# EAGLE board Neat Trug-Gaaris (EAGLE 7.6.0)

Size 73.58 x 63.39 mm. Coordinates in mm from the lower left corner, seen from the top.
Outline: 0,0 56.82,0 56.82,53.33 0,53.33 0,0
Copper layers (1*16): Top 0.035mm / dielectric 1.5mm / Bottom 0.035mm
Design rules "default": minimum track width 10mil, minimum drill 24mil, track to track 8mil, track to pad 8mil, pad to pad 8mil, via to via 8mil, smd to smd 8mil, copper to edge 40mil, drill to drill 8mil, minimum pad ring 10mil, minimum via ring 8mil, stop-mask expansion 4mil, vias tented up to drill 0mil, thermal gap 10mil

## Footprints (pad centres in the part's own frame; a part is rotated, then mirrored left to right if it is on the bottom)
LED5MM = drill 0.813 octagon: A -1.27,0; K 1.27,0
ARDUINO_UNO = drill 1.016 pad 1.88: 0 63.5,50.8; 1 60.96,50.8; 2 58.42,50.8; 3 55.88,50.8; 3.3V 35.56,2.54; 4 53.34,50.8; 5 50.8,50.8; 5V 38.1,2.54; 6 48.26,50.8; 7 45.72,50.8; 8 41.656,50.8; 9 39.116,50.8; 10 36.576,50.8; 11 34.036,50.8; 12 31.496,50.8; 13 28.956,50.8; A0 50.8,2.54; A1 53.34,2.54; A2 55.88,2.54; A3 58.42,2.54; A4 60.96,2.54; A5 63.5,2.54; AREF 23.876,50.8; GND 26.416,50.8; GND. 43.18,2.54; GND.. 40.64,2.54; I/OREF 30.48,2.54; N/C 27.94,2.54; RESET 33.02,2.54; SCL 18.796,50.8; SDA 21.336,50.8; VIN 45.72,2.54 | hole 3.2: 66.04,7.62; 66.04,35.56; 15.24,50.8; 13.97,2.54
DIL16 = drill 0.813 long: 1 -8.89,-3.81; 2 -6.35,-3.81; 3 -3.81,-3.81; 4 -1.27,-3.81; 5 1.27,-3.81; 6 3.81,-3.81; 7 6.35,-3.81; 8 8.89,-3.81; 9 8.89,3.81; 10 6.35,3.81; 11 3.81,3.81; 12 1.27,3.81; 13 -1.27,3.81; 14 -3.81,3.81; 15 -6.35,3.81; 16 -8.89,3.81

## Placement (x,y rotation side)
D2  [LED5MM]  5,35.48 0 top
D3  [LED5MM]  5,48.18 0 top
D4  [LED5MM]  5,60.88 0 top
D5  [LED5MM]  5,73.58 0 top  (outside the outline)
D6  [LED5MM]  5,86.28 0 top  (outside the outline)
D7  [LED5MM]  5,98.98 0 top  (outside the outline)
D8  [LED5MM]  5,111.68 0 top  (outside the outline)
D9  [LED5MM]  5,124.38 0 top  (outside the outline)
D10  [LED5MM]  5,137.08 0 top  (outside the outline)
D11  [LED5MM]  5,149.78 0 top  (outside the outline)
D12  [LED5MM]  5,162.48 0 top  (outside the outline)
D13  [LED5MM]  5,175.18 0 top  (outside the outline)
D14  [LED5MM]  5,187.88 0 top  (outside the outline)
D15  [LED5MM]  5,200.58 0 top  (outside the outline)
D16  [LED5MM]  5,213.28 0 top  (outside the outline)
D17  [LED5MM]  5,225.98 0 top  (outside the outline)
D18  [LED5MM]  5,238.68 0 top  (outside the outline)
D19  [LED5MM]  5,251.38 0 top  (outside the outline)
D20  [LED5MM]  5,264.08 0 top  (outside the outline)
D21  [LED5MM]  5,276.78 0 top  (outside the outline)
D22  [LED5MM]  5,289.48 0 top  (outside the outline)
D23  [LED5MM]  5,302.18 0 top  (outside the outline)
D24  [LED5MM]  5,314.88 0 top  (outside the outline)
D25  [LED5MM]  5,327.58 0 top  (outside the outline)
D26  [LED5MM]  5,340.28 0 top  (outside the outline)
D27  [LED5MM]  5,352.98 0 top  (outside the outline)
D28  [LED5MM]  5,365.68 0 top  (outside the outline)
D29  [LED5MM]  5,378.38 0 top  (outside the outline)
D30  [LED5MM]  5,391.08 0 top  (outside the outline)
D31  [LED5MM]  5,403.78 0 top  (outside the outline)
D32  [LED5MM]  5,416.48 0 top  (outside the outline)
D33  [LED5MM]  5,429.18 0 top  (outside the outline)
D34  [LED5MM]  5,441.88 0 top  (outside the outline)
D35  [LED5MM]  5,454.58 0 top  (outside the outline)
D36  [LED5MM]  5,467.28 0 top  (outside the outline)
D37  [LED5MM]  5,479.98 0 top  (outside the outline)
D38  [LED5MM]  5,492.68 0 top  (outside the outline)
D39  [LED5MM]  5,505.38 0 top  (outside the outline)
D40  [LED5MM]  5,518.08 0 top  (outside the outline)
D41  [LED5MM]  5,530.78 0 top  (outside the outline)
D42  [LED5MM]  5,543.48 0 top  (outside the outline)
D43  [LED5MM]  5,556.18 0 top  (outside the outline)
D44  [LED5MM]  5,568.88 0 top  (outside the outline)
D45  [LED5MM]  5,581.58 0 top  (outside the outline)
D46  [LED5MM]  5,594.28 0 top  (outside the outline)
D47  [LED5MM]  5,606.98 0 top  (outside the outline)
D48  [LED5MM]  5,619.68 0 top  (outside the outline)
D49  [LED5MM]  5,632.38 0 top  (outside the outline)
D50  [LED5MM]  5,645.08 0 top  (outside the outline)
D51  [LED5MM]  5,657.78 0 top  (outside the outline)
D52  [LED5MM]  5,670.48 0 top  (outside the outline)
D53  [LED5MM]  5,683.18 0 top  (outside the outline)
D54  [LED5MM]  5,695.88 0 top  (outside the outline)
D55  [LED5MM]  5,708.58 0 top  (outside the outline)
D56  [LED5MM]  5,721.28 0 top  (outside the outline)
D57  [LED5MM]  5,733.98 0 top  (outside the outline)
D58  [LED5MM]  5,746.68 0 top  (outside the outline)
D59  [LED5MM]  5,759.38 0 top  (outside the outline)
D60  [LED5MM]  5,772.08 0 top  (outside the outline)
D61  [LED5MM]  5,784.78 0 top  (outside the outline)
D62  [LED5MM]  5,797.48 0 top  (outside the outline)
D63  [LED5MM]  5,810.18 0 top  (outside the outline)
D64  [LED5MM]  5,822.88 0 top  (outside the outline)
D65  [LED5MM]  5,835.58 0 top  (outside the outline)
U1  [ARDUINO_UNO]  5,10.08 0 top
U2  [DIL16]  5,22.78 0 top
U3  [DIL16]  5,848.28 0 top  (outside the outline)

## Library data of the parts
D2-D65 U1-U3 = AUTODESK_CIRCUITS_BREADBOARD

## Nets
N$1: D2.A D5.A D6.A D7.A D8.A D9.A D10.A D11.A U2.7
N$2: D3.A D12.A D13.A D14.A D15.A D16.A D17.A D18.A U2.6
N$3: D4.A D19.A D20.A D21.A D22.A D23.A D24.A D25.A U2.5
N$4: D26.A D27.A D28.A D29.A D30.A D31.A D32.A D33.A U2.4
N$5: D34.A D35.A D36.A D37.A D38.A D39.A D40.A D41.A U2.3
N$6: D42.A D43.A D44.A D45.A D46.A D47.A D48.A D49.A U2.2
N$7: D50.A D51.A D52.A D53.A D54.A D55.A D56.A D57.A U2.1
N$8: D58.A D59.A D60.A D61.A D62.A D63.A D64.A D65.A U2.15
N$9: D8.K D12.K D19.K D26.K D34.K D42.K D50.K D58.K U3.15
N$10: D2.K D3.K D4.K D27.K D35.K D43.K D51.K D59.K U3.1
N$11: D5.K D13.K D20.K D28.K D36.K D44.K D52.K D60.K U3.2
N$12: D6.K D14.K D21.K D29.K D37.K D45.K D53.K D61.K U3.3
N$13: D7.K D15.K D22.K D30.K D38.K D46.K D54.K D62.K U3.4
N$14: D9.K D16.K D23.K D31.K D39.K D47.K D55.K D63.K U3.5
N$15: D11.K D17.K D24.K D32.K D40.K D48.K D56.K D64.K U3.6
N$16: D10.K D18.K D25.K D33.K D41.K D49.K D57.K D65.K U3.7
N$17: U1.5V U2.10 U2.16 U3.10 U3.16
N$18: U1.3 U2.14
N$19: U1.GND.. U2.8 U3.8
N$20: U1.4 U2.12
N$21: U1.5 U2.11
N$22: U1.13 U3.11
N$23: U1.GND. U2.13 U3.13
N$24: U1.A0 U3.12
N$25: U1.A1 U3.14

## Tracks (layer width: path | path; a pad name or v marks a point on that pad's centre or on a via)
N$1  (8 unrouted)
N$2  (8 unrouted)
N$3  (8 unrouted)
N$4  (8 unrouted)
N$5  (8 unrouted)
N$6  (8 unrouted)
N$7  (8 unrouted)
N$8  (8 unrouted)
N$9  (8 unrouted)
N$10  (8 unrouted)
N$11  (8 unrouted)
N$12  (8 unrouted)
N$13  (8 unrouted)
N$14  (8 unrouted)
N$15  (8 unrouted)
N$16  (8 unrouted)
N$17  (4 unrouted)
N$18  (1 unrouted)
N$19  (2 unrouted)
N$20  (1 unrouted)
N$21  (1 unrouted)
N$22  (1 unrouted)
N$23  (2 unrouted)
N$24  (1 unrouted)
N$25  (1 unrouted)